# Altium PCB CarGeoLogger.PcbDoc
Units mil, origin at the board's own origin, x right, y up, seen from the top; angles counter-clockwise.
Board outline 1968.5 x 1968.5 mil, 2 copper layers (Top Layer, Bottom Layer); 34 components, 34 nets, 195 pads, 29 vias.
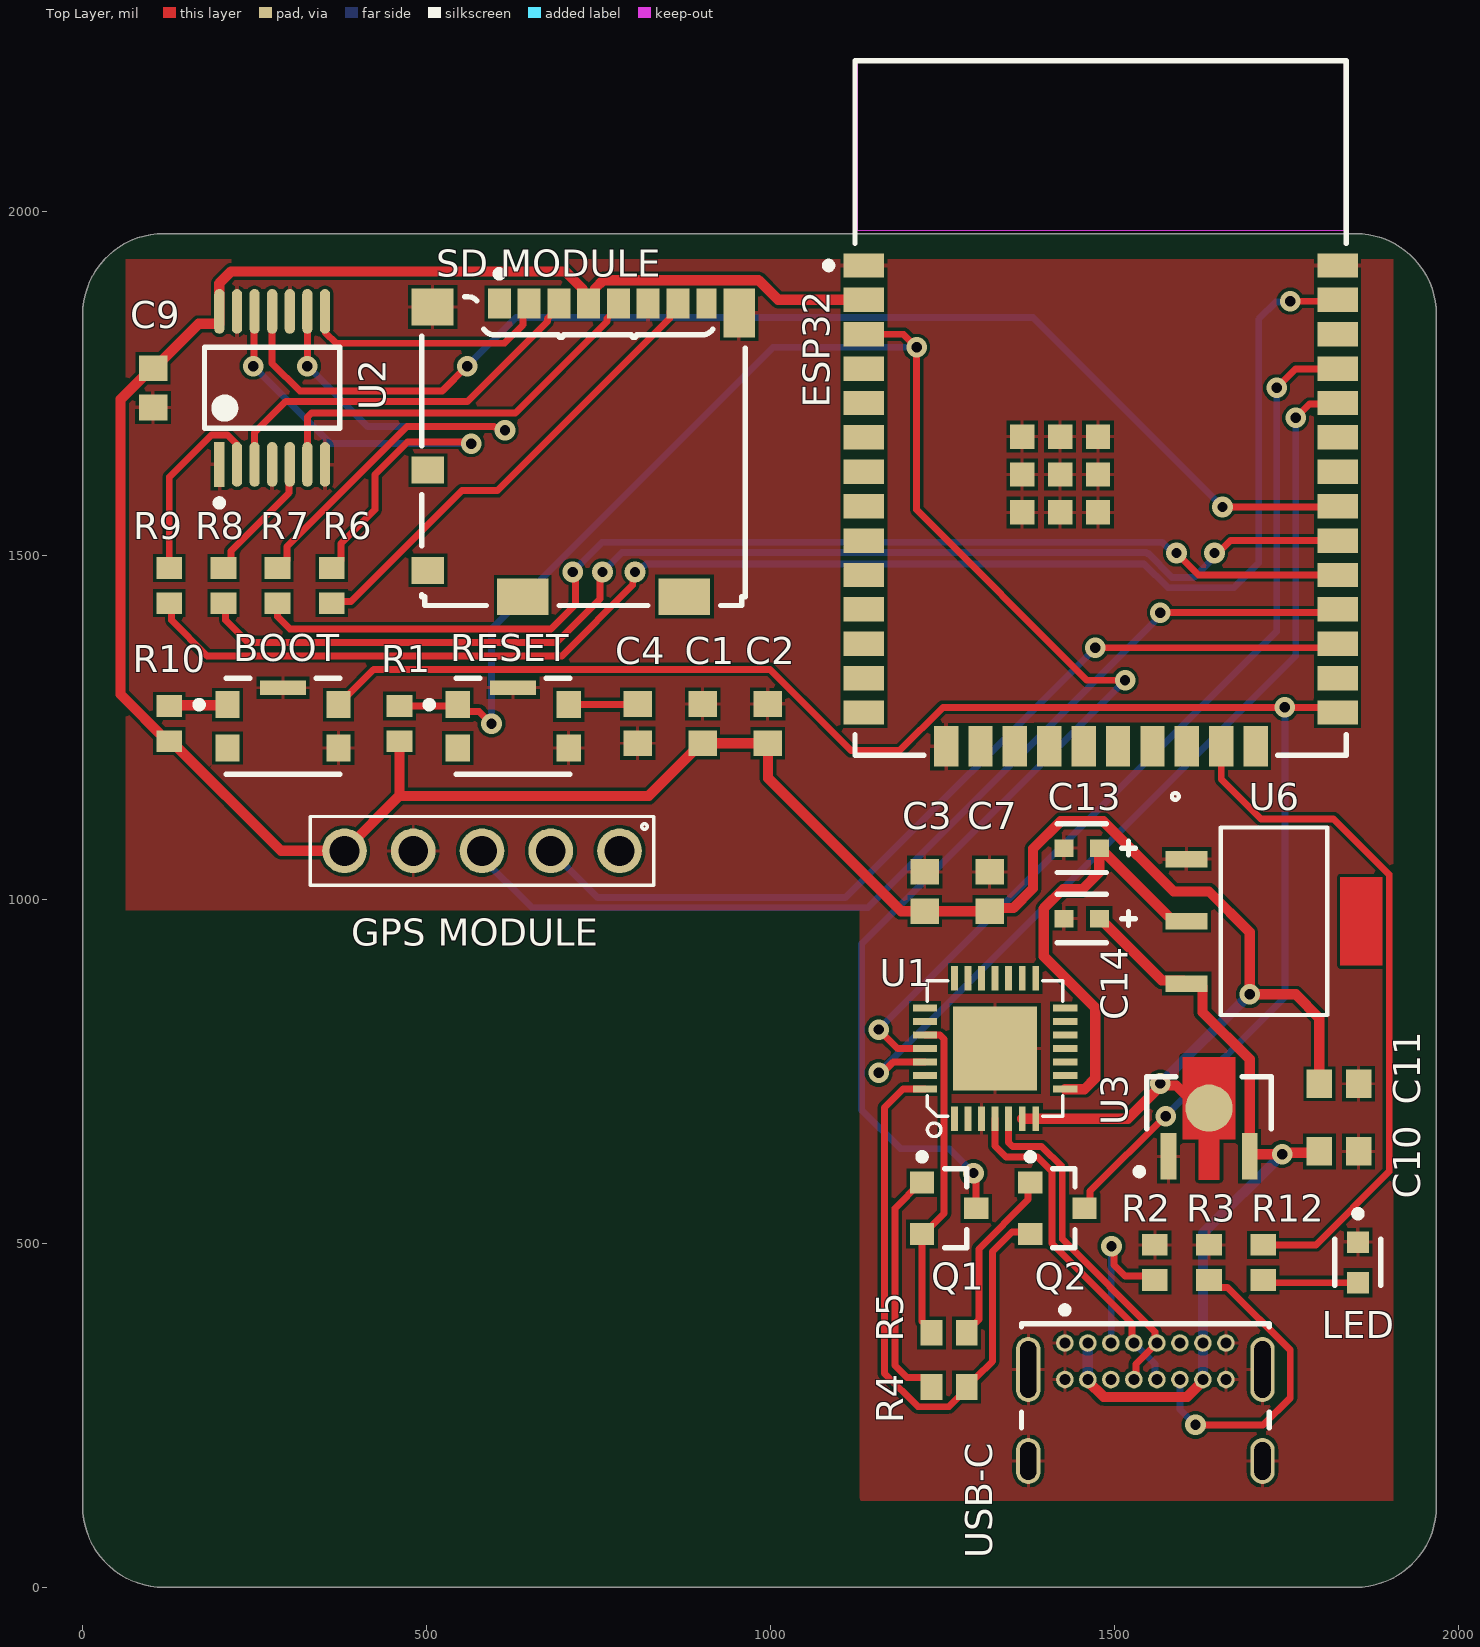
[diagram p0: Top Layer view]
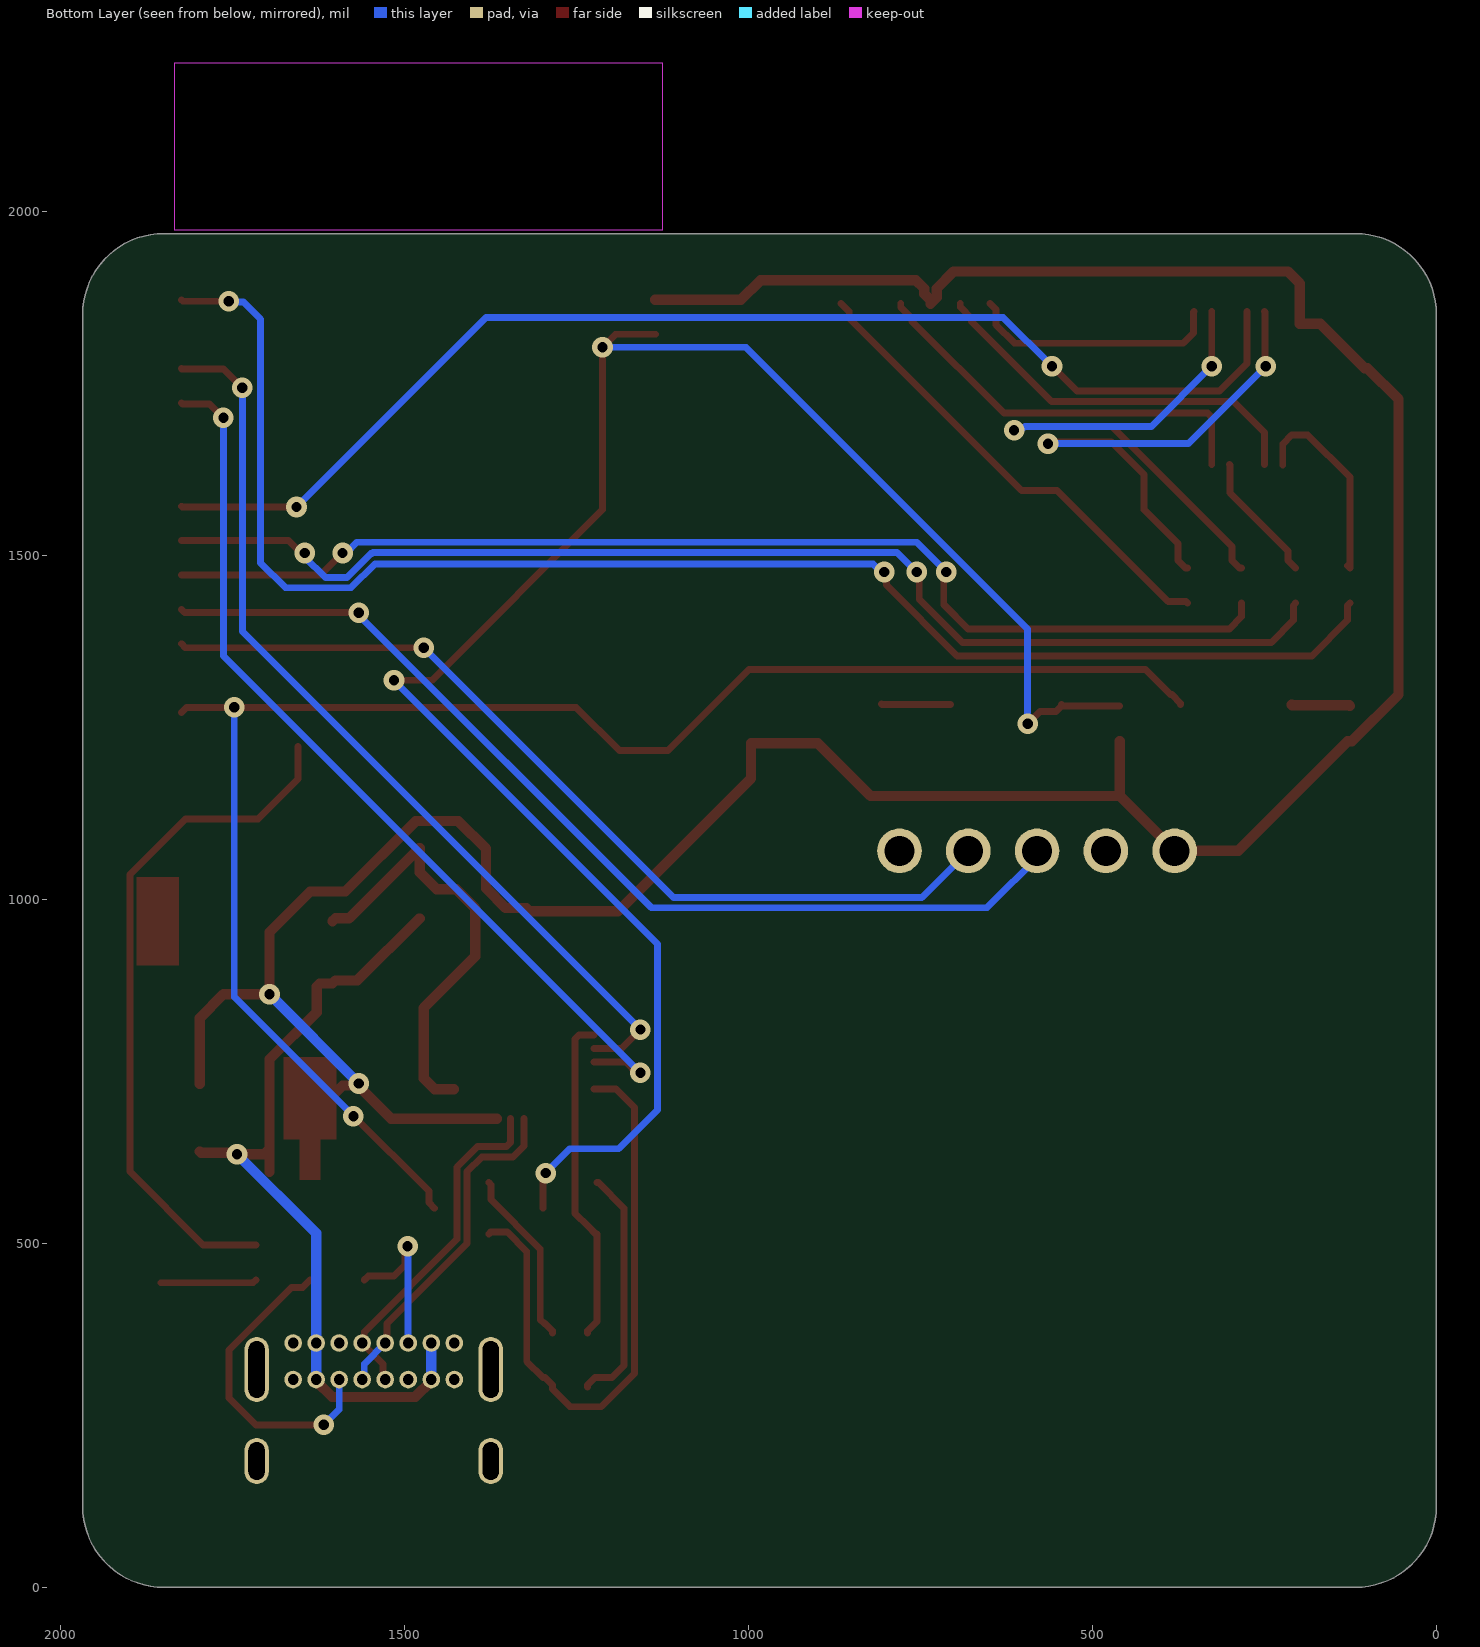
[diagram p1: Bottom Layer view, seen from below]
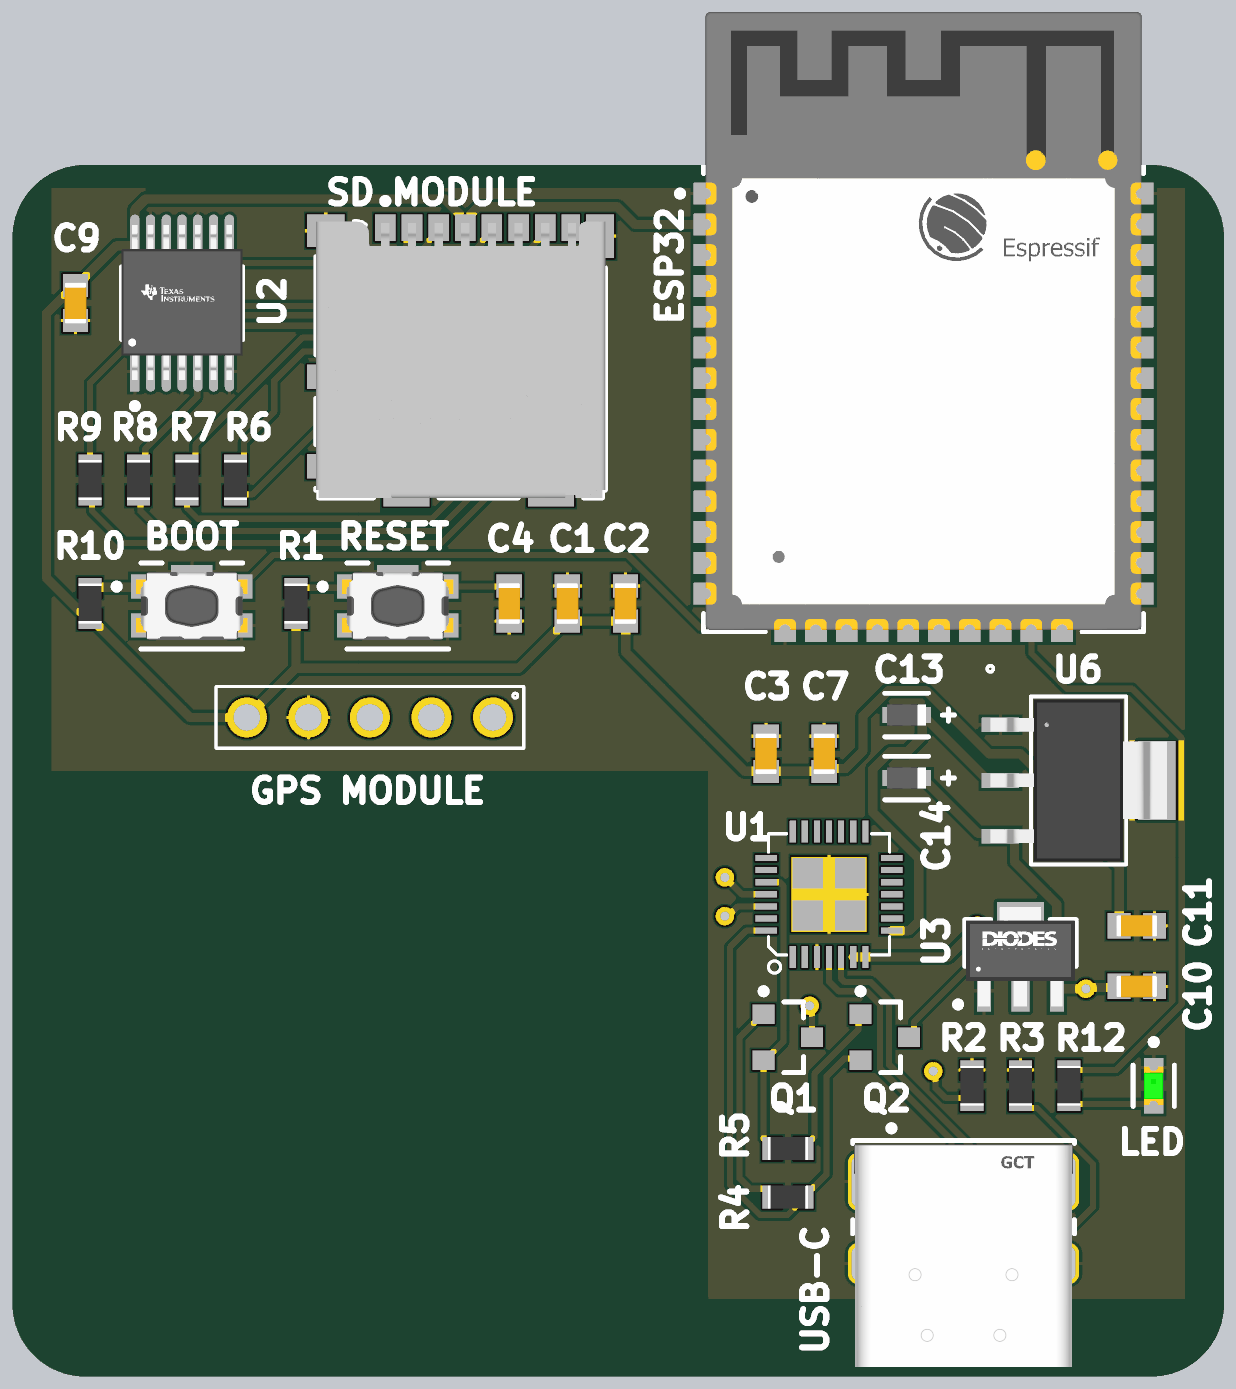
[diagram p2: 3D render of the assembled board from above, using the file's embedded part models]

## Layer stack, top to bottom
Top Solder: solder mask 0.4, Solder Resist, Dk 3.5
Top Layer: signal copper 1.4
Dielectric 1: dielectric 12.6, FR-4, Dk 4.8
Bottom Layer: signal copper 1.4
Bottom Solder: solder mask 0.4, Solder Resist, Dk 3.5

## Board outline
0,118.11 0,1850.39 cw(c118.11,1850.39) 118.11,1968.5 1850.39,1968.5 cw(c1850.39,1850.39) 1968.5,1850.39 1968.5,118.11 cw(c1850.39,118.11) 1850.39,0 118.11,0 cw(c118.11,118.11)

## Design rules (kind name [scope] priority, off if disabled: settings)
BoardOutlineClearance [All] p1: gap=7.87 ignorepadtopadclearanceinfootprint=FALSE
Clearance [All] p1: gap=5 ignorepadtopadclearanceinfootprint=FALSE except(9.84: Arc-Hole Track-Hole SMDPad-Hole THPad-Hole Via-Hole Fill-Hole Poly-Hole Region-Hole Text-Hole)
ComponentClearance [All] p1: gap=5 collisioncheckmode=3 verticalgap=5 showdistances=TRUE
DiffPairsRouting [All] p1: maxlimit=10 minlimit=5 mostfreqgap=5 toplayer_minwidth=5 toplayer_maxwidth=1000 toplayer_prefwidth=5 bottomlayer_minwidth=5 bottomlayer_maxwidth=1000 bottomlayer_prefwidth=5 maxuncoupledlength=500
Height [All] p1: minheight=0 maxheight=71497.94 prefheight=500
HoleSize [All] p1: absolutevalues=TRUE maxlimit=248.03 minlimit=11.81 maxpercent=80.000 minpercent=20.000
HoleToHoleClearance [All] p1: gap=9.84 allowstackedmicrovias=FALSE
MinimumAnnularRing [All] p1: minimumring=3
MinimumSolderMaskSliver [All] p1: minsoldermaskwidth=0
PlaneClearance [All] p1: clearance=5
PlaneConnect PlaneConnectPowerPads [InPadClass('PowerPads')] p1: planeconnectstyle=Direct reliefexpansion=20 reliefentries=4 reliefconductorwidth=10 reliefairgap=10
PlaneConnect [All] p2: pad.planeconnectstyle=Relief pad.reliefexpansion=11.81 pad.reliefentries=4 pad.reliefconductorwidth=5 pad.reliefairgap=5 via.planeconnectstyle=Direct via.reliefexpansion=11.81 via.reliefentries=4 via.reliefconductorwidth=5 via.reliefairgap=5
PolygonConnect PolygonConnectPowerPads [All vs (InPadClass('PowerPads'))] p1: connectstyle=Direct reliefconductorwidth=10 reliefentries=4 polygonreliefangle="90 Angle" airgapwidth=10
PolygonConnect [All] p2: thpad.connectstyle=Relief thpad.reliefconductorwidth=5 thpad.reliefentries=4 thpad.polygonreliefangle="90 Angle" thpad.airgapwidth=5 smdpad.connectstyle=Relief smdpad.reliefconductorwidth=5 smdpad.reliefentries=4 smdpad.polygonreliefangle="90 Angle" smdpad.airgapwidth=5 via.connectstyle=Direct via.reliefconductorwidth=5 via.reliefentries=4 via.polygonreliefangle="90 Angle" via.airgapwidth=5
RoutingVias [All] p1: holewidth=11.81 width=23.62 viastyle="Through Hole" minholewidth=11.81 minwidth=23.62 maxholewidth=23.62 maxwidth=259.84
SilkToSilkClearance [All] p1: silktosilkclearance=0
SilkToSolderMaskClearance [IsPad] p1: minsilkscreentomaskgap=5 clearancetoexposedcopper=TRUE
SolderMaskExpansion [All] p1: expansion=2.95 istentingtop=FALSE
Width [All] p1: maxlimit=1000 minlimit=5 preferedwidth=5 minimp=50.000000 maximp=50.000000 favimp=50.000000
20 further rules are at their usual default settings.

## Components (designator, comment, footprint, x,y, rotation, side; value= is the part's Value field where it differs from the comment)
BOOT "KMR221GLFS" FP-KMR221GLFS-MFG 291.34,1251.97 r0 top (schematic designator SW2)
C1 "22u" CAPC1608X90X35ML10T15 901.57,1255.91 r270 top
C2 "0.1u" CAPC1608X90X35ML10T15 996.06,1255.91 r270 top
C3 "10u" CAPC1608X90X35ML10T15 1224.41,1011.81 r270 top
C4 "1u" CAPC1608X90X35ML10T15 807.09,1255.91 r90 top
C7 "0.1u" CAPC1608X90X35ML10T15 1318.9,1011.81 r270 top
C9 "0.1u" CAPC1608X90X35ML10T15 102.36,1744.09 r90 top
C10 "10u" CAPC1608X90X35ML10T15 1826.77,633.86 r180 top
C11 "22u" CAPC1608X90X35ML10T15 1826.77,732.28 r180 top
C13 "10u" FP-F38M-MFG 1452.76,1074.8 r0 top value=10uF
C14 "10u" FP-F38M-MFG 1452.76,972.44 r0 top value=10uF
ESP32 "ESP32-WROOM-32D(M113DH2800PH3Q0)" FP-ESP32-WROOM-32D_M113DH-MFG 1480.31,1714.96 r0 top (schematic designator MD1)
"GPS MODULE" "61300511121" 61300511121 580.71,1070.87 r180 top locked (schematic designator J2)
LED "LTST-C190GKT" FP-LTST-C190GKT-MFG 1854.33,472.44 r270 top (schematic designator D2)
Q1 "BC817-40LT1G" ONSC-SOT-23-3-318-08_V 1259.84,551.18 r0 top
Q2 "BC817-40LT1G" ONSC-SOT-23-3-318-08_V 1417.32,551.18 r0 top
R1 "10k" RESC1609X50X30NL8T20 460.63,1255.91 r270 top
R2 "5.1k" RESC1609X50X30NL8T20 1559.06,472.44 r270 top
R3 "5.1k" RESC1609X50X30NL8T20 1637.8,472.44 r270 top
R4 "10k" RESC1609X50X30NL8T20 1259.84,291.34 r0 top
R5 "10k" RESC1609X50X30NL8T20 1259.84,370.08 r180 top
R6 "3.3K" RESC1609X50X30NL8T20 362.2,1456.69 r90 top
R7 "3.3K" RESC1609X50X30NL8T20 283.46,1456.69 r90 top
R8 "3.3K" RESC1609X50X30NL8T20 204.72,1456.69 r90 top
R9 "3.3K" RESC1609X50X30NL8T20 125.98,1456.69 r270 top
R10 "10k" RESC1609X50X30NL8T20 125.98,1255.91 r270 top
R12 "1k" RESC1609X50X30NL8T20 1716.54,472.44 r90 top
RESET "KMR221GLFS" FP-KMR221GLFS-MFG 625.98,1251.97 r0 top (schematic designator SW1)
"SD MODULE" "104031-0811" MOLX-104031-0811_V 728.35,1653.54 r180 top (schematic designator SD1)
U1 "CP2102-GMR(QFN28)" QFN28G_0.5-5X5MM 1326.77,783.46 r90 top
U2 "SN74LVC125APWR" FP-PW0014A-IPC_B 275.59,1744.09 r90 top
U3 "AZ1117CR-3.3TRG1" FP-SOT89-MFG 1637.8,691.1 r0 top
U6 "NCV1117ST50T3G" SOT223-3_ONS 1732.28,968.5 r270 top
USB-C "USB4085-GF-A" FP-USB4085-GF-A-MFG 1545.28,196.85 r0 top locked (schematic designator J1)

## Footprints (in the part's own frame and the unit in brackets; to place one, negate y for a bottom-side part, rotate by r counter-clockwise, add the part's x,y. Pads: shape width x height; smd on the part's side, far side on the other; paste and mask are expansions set on the pad)
61300511121 [mm]
  round 1.65 hole 1.1: 1(-5.08,0) 2(-2.54,0) 3(0,0) 4(2.54,0) 5(5.08,0)
  silkscreen extent -6.35,-1.27 6.35,1.27
CAPC1608X90X35ML10T15 [mm] "Chip Capacitor, 2-Leads, Body 1.7x0.9mm, IPC Low Density"
  rect 0.95x1.05 smd: 1(-0.725,0) 2(0.725,0)
  body extent -0.85,-0.45 0.85,0.45, height 0.9
FP-ESP32-WROOM-32D_M113DH-MFG [mm]
  rect 1.5x0.9 smd paste+0 mask+0: 1(-8.75,5.26) 2(-8.75,3.99) 3(-8.75,2.72) 4(-8.75,1.45) 5(-8.75,0.18) 6(-8.75,-1.09) 7(-8.75,-2.36) 8(-8.75,-3.63) 9(-8.75,-4.9) 10(-8.75,-6.17) 11(-8.75,-7.44) 12(-8.75,-8.71) 13(-8.75,-9.98) 14(-8.75,-11.25) 25(8.75,-11.25) 26(8.75,-9.98) 27(8.75,-8.71) 28(8.75,-7.44) 29(8.75,-6.17) 30(8.75,-4.9) 31(8.75,-3.63) 32(8.75,-2.36) 33(8.75,-1.09) 34(8.75,0.18) 35(8.75,1.45) 36(8.75,2.72) 37(8.75,3.99) 38(8.75,5.26)
  rect 0.9x1.5 smd paste+0 mask+0: 15(-5.71,-12.5) 16(-4.44,-12.5) 17(-3.17,-12.5) 18(-1.9,-12.5) 19(-0.63,-12.5) 20(0.64,-12.5) 21(1.91,-12.5) 22(3.18,-12.5) 23(4.45,-12.5) 24(5.72,-12.5)
  rect 0.9x0.9 smd paste+0 mask+0: 39(-2.9,-3.86) 39(-2.9,-2.46) 39(-2.9,-1.06) 39(-1.5,-3.86) 39(-1.5,-2.46) 39(-1.5,-1.06) 39(-0.1,-3.86) 39(-0.1,-2.46) 39(-0.1,-1.06)
  Keep-Out Layer region: -9,6.56 9,6.56 9,12.75 -9,12.75
  Keep-Out Layer region: -9,6.56 9,6.56 9,12.75 -9,12.75
  silkscreen extent -10.17,-12.83 9.08,12.83, body extent -9.6,-13.35 9.6,12.93, height 0.25
FP-F38M-MFG [mm]
  rect 0.7x0.65 smd paste+0 mask+0: 1(-0.65,0) 2(0.65,0)
  silkscreen extent -0.9,-0.9 1.97,0.9, body extent -1.1,-0.63 1.1,0.63, height 0.25
FP-KMR221GLFS-MFG [mm]
  rect 0.9x1 smd paste+0 mask+0: 1(-2.05,0.8) 2(2.05,0.8) 3(-2.05,-0.8) 4(2.05,-0.8)
  rect 1.7x0.55 smd paste+0 mask+0: 5(0,1.425)
  silkscreen extent -3.22,-1.78 2.1,1.78, body extent -2.6,-1.5 2.6,1.8, height 0.25
FP-LTST-C190GKT-MFG [mm]
  rect 0.8x0.8 smd paste+0 mask+0: 1(-0.75,0) 2(0.75,0)
  silkscreen extent -1.92,-0.85 0.85,0.85, body extent -1.25,-0.55 1.25,0.55, height 0.25
FP-PW0014A-IPC_B [mm]
  rect 1.655x0.381 smd paste+0 mask+0: 1(-2.825,1.95)
  rrect100% 1.655x0.381 smd paste+0 mask+0: 2(-2.825,1.3) 3(-2.825,0.65) 4(-2.825,0) 5(-2.825,-0.65) 6(-2.825,-1.3) 7(-2.825,-1.95) 8(2.825,-1.95) 9(2.825,-1.3) 10(2.825,-0.65) 11(2.825,0) 12(2.825,0.65) 13(2.825,1.3) 14(2.825,1.95)
  silkscreen extent -4.37,-2.5 1.5,2.5, body extent -3.9,-2.75 3.9,2.75, height 0.25
FP-SOT89-MFG [mm]
  rect 0.58x1.73 smd paste+0 mask+0: 1(-1.5,-1.635) 3(1.5,-1.635)
  round 1.74 smd paste+0 mask+0: 2(0,0.146)
  Top Layer region: -0.38,-2.5 -0.38,-1 -0.967,-1 -0.967,2.03 0.967,2.03 0.967,-1 0.38,-1 0.38,-2.5
  silkscreen extent -2.7,-2.32 2.3,1.3, body extent -2.4,-2.6 2.4,2.13, height 0.25
FP-USB4085-GF-A-MFG [mm]
  rrect100% 0.9x2.4 hole 2.1 slot 0.6 at 0 deg paste-1000 mask+0: 1(-4.325,3.045) 2(4.325,3.045)
  rrect100% 0.9x1.7 hole 1.4 slot 0.6 at 0 deg paste-1000 mask+0: 3(-4.325,-0.335) 4(4.325,-0.335)
  round 0.65 hole 0.4 paste-1000 mask+0: A1(-2.975,4.025) A4(-2.125,4.025) A5(-1.275,4.025) A6(-0.425,4.025) A7(0.425,4.025) A8(1.275,4.025) A9(2.125,4.025) A12(2.975,4.025) B1(2.975,2.675) B4(2.125,2.675) B5(1.275,2.675) B6(0.425,2.675) B7(-0.425,2.675) B8(-1.275,2.675) B9(-2.125,2.675) B12(-2.975,2.675)
  silkscreen extent -4.57,0.89 4.57,5.37, body extent -4.87,-4.83 4.87,4.83, height 0.25
MOLX-104031-0811_V [mm] "Micro SD, 8-Leads, Body 11.95x11.4mm, Pitch 1.1mm"
  rect 0.85x1.1 smd: 1(3.113,-5.412) 2(2.013,-5.412) 3(0.913,-5.412) 4(-0.188,-5.412) 5(-1.288,-5.412) 6(-2.387,-5.412) 7(-3.487,-5.412)
  rect 0.75x1.1 smd: 8(-4.537,-5.412)
  rect 1.2x1 smd: 9(5.748,0.738) 10(5.748,4.438)
  rect 1.55x1.35 smd: 11(5.573,-5.287)
  rect 1.17x1.8 smd: 12(-5.747,-5.062)
  rect 1.9x1.35 smd: 13(-3.722,5.413) 14(2.248,5.413)
  silkscreen extent -5.97,-6.64 5.98,5.74, body extent -5.97,-5.66 5.98,5.74, height 1.45
ONSC-SOT-23-3-318-08_V [mm] "SOT23, 3-Leads, Body 2.92x1.3mm, Pitch 0.95mm"
  rect 0.9x0.8 smd: 1(-1,0.95) 2(-1,-0.95) 3(1,0)
  silkscreen extent -1.12,-1.46 0.65,2.02, body extent -0.65,-1.46 0.65,1.46, height 1.11
QFN28G_0.5-5X5MM [mm]
  rect 0.9x0.254 smd: 1(-2.59,1.5) 2(-2.59,1) 3(-2.59,0.5) 4(-2.59,0) 5(-2.59,-0.5) 6(-2.59,-1) 7(-2.59,-1.5) 15(2.59,-1.5) 16(2.59,-1) 17(2.59,-0.5) 18(2.59,0) 19(2.59,0.5) 20(2.59,1) 21(2.59,1.5)
  rect 0.254x0.9 smd: 8(-1.5,-2.59) 9(-1,-2.59) 10(-0.5,-2.59) 11(0,-2.59) 12(0.5,-2.59) 13(1,-2.59) 14(1.5,-2.59) 22(1.5,2.59) 23(1,2.59) 24(0.5,2.59) 25(0,2.59) 26(-0.5,2.59) 27(-1,2.59) 28(-1.5,2.59)
  rect 3.1x3.1 smd paste-3: 29(0,0)
  silkscreen extent -3.25,-2.5 2.5,2.5
RESC1609X50X30NL8T20 [mm] "Chip Resistor, 2-Leads, Body 1.65x0.95mm, IPC Medium Density"
  rect 0.8x0.95 smd: 1(-0.65,0) 2(0.65,0)
  body extent -0.82,-0.48 0.82,0.48, height 0.5
SOT223-3_ONS [mil]
  rect 24x61 smd paste+0 mask+0: 1(-90.5,-127) 2(0,-127) 3(90.5,-127)
  Top Layer region: 64,96.5 64,157.5 -64,157.5 -64,96.5
  silkscreen extent -186,-148 137,78, body extent -131,-144 131,144, height 68

## Part data
BOOT RESET: library part CMP-10040-000018-1, "SWITCH TACTILE SPST-NO 0.05A 32V", Case/Package=SMD/SMT, Contact Current Rating=50mA, Contact Resistance=100mR, Max Operating Temperature=85°C, Max Voltage Rating (DC)=32V, Min Operating Temperature=-40°C, Operating Force=2N, Package Quantity=1, Power Rating=1W, Actuator Length=0.5mm, Actuator Type=Standard, Contact Material=Silver, Contact Plating=Silver, Current Rating=50mA, Depth=4.6mm, Illumination Type=Non-Illuminated, Lead Free="Lead Free", Length=2.8mm, Max Current Rating=50mA, Mechanical Life=200000Cycles, Mount="Surface Mount", Orientation=Straight, Packaging="Tape and Reel", Radiation Hardening=No, REACH SVHC="No SVHC", Switch Function=Off-Mom, Switch Travel=0.25mm, Termination="Gull Wing", Throw Configuration=SPST, Voltage Rating (DC)=32V, Width=2.8mm
C1 C11: library part CMP-2000-04945-1, "Chip Capacitor, 0603 (1608 Metric), F381A106MMAAH1", Capacitance=22pF, Case Size/Dimension=0603, Dielectric=C0G, Manufacturer=Murata, Package Description="2-Pin Surface Mount Device, Body 1.6 x 0.8 mm", Package Reference=603, Rated Voltage=50V, Tolerance (%)=±5%, ComponentLink1Description=https://www.digikey.com/en/products/detail/kyocera-avx/F381A106MMAAH1/5730801, Datasheet URL=https://datasheet.ciiva.com/11786/0900766b807a1cab-11786398.pdf, Datasheet Version=Jul-06, Manufacturer URL=http://www.murata.com/
C2 C3 C4 C7 C9 C10: library part CMP-2000-04945-1, "Chip Capacitor, 0603 (1608 Metric)", Capacitance=22pF, Case Size/Dimension=0603, Dielectric=C0G, Manufacturer=Murata, Package Description="2-Pin Surface Mount Device, Body 1.6 x 0.8 mm", Package Reference=603, Rated Voltage=50V, Tolerance (%)=±5%, Datasheet URL=https://datasheet.ciiva.com/11786/0900766b807a1cab-11786398.pdf, Datasheet Version=Jul-06, Manufacturer URL=http://www.murata.com/
C13 C14: library part CMP-04423-000015-1, "CAP TANT POLY 10UF 10V SMD", Capacitance=10uF, Leakage Current=10uA, Manufacturer=AVX, Manufacturer Part Number=F381A106MMAAH1, Package=F38M, Ripple Current=289mA, Temperature="-55°C to +105°C", Temperature Range High=+105°C, Temperature Range Low=-55°C, Tolerance=20%, Voltage Rating=10V, Automotive=No, Category=Cap, ComponentLink2Description=Datasheet, ComponentLink2URL=http://datasheets.avx.com/F38.pdf, Device Class L1="Passive Components", Device Class L2=Capacitors, Device Class L3="Polymer Capacitors", Digikey Description="CAP TANT POLY 10UF 10V SMD", Dissipation Factor=15%, Esr=300mΩ, Footprint Url=http://www.avx.com/download/software/literature/AVX-Footprint-Library.pdf, Height=0.9mm, Lead Free=Yes, Life=1000Hours, Material=Tantalum-Polymer, Mouser Description="Cap Tant Polymer 10uF 10VDC M CASE 20% (1.6 X 0.85 X 0.8mm) Undertab SMD 1608-09 0.3 Ohm 105C T/R", Octopart=https://octopart.com/f381a106mmaah1-avx-67040376, RoHS=TRUE
ESP32: library part CMP-194065-000024-1, "RX TXRX MOD WIFI TRACE ANT SMD"
"GPS MODULE": library part CMP-059-000000-1, "Connector Header Through Hole 5 position 0.100 (2.54mm)", Package=None, Availability="In Stock", Check_prices=https://www.snapeda.com/parts/61300511121/Wurth+Electronics+Inc./view-part/?ref=eda, Component Type=Standard, Design Item ID=61300511121, MF="Wurth Electronics", MP=61300511121, Pin Count=5, Price=None, Purchase-URL=https://pricing.snapeda.com/search/part/61300511121/?ref=eda, SnapEDA_Link=https://www.snapeda.com/parts/61300511121/Wurth+Electronics+Inc./view-part/?ref=snap, Source=61300511121.SchLib
LED: library part CMP-22017-000005-2, "LED GREEN CLEAR CHIP SMD", Case Code (Imperial)=0603, Case Code (Metric)=1608, Color=Green, Forward Current=30mA, Forward Voltage=2.1V, Lens Color=Colorless, Max Operating Temperature=85°C, Min Operating Temperature=-55°C, Package Quantity=1, Power Dissipation=100mW, Reverse Voltage=5V, Test Current=10mA, Voltage=2V, Case/Package=0603, Depth=0.8mm, Dominant Wavelength=569nm, Height=0.8mm, Illumination Color=Green, Lead Free="Lead Free", Length=1.6mm, Lens Style=Clear, Lens Transparency=Clear, Luminous Intensity=6mcd, Mount="Surface Mount", Number of Elements=1, Number of LEDs=1, Number of Pins=2, Packaging="Tape and Reel", Power Rating=100mW, Radiation Hardening=No, Viewing Angle=130°, Wavelength=565nm, Width=0.8mm
Q1 Q2: library part CMP-1048-00019-1, "General Purpose Transistor, NPN Silicon, 3-Pin SOT-23, Pb-Free, Tape and Reel", Manufacturer="On Semiconductor", ComponentLink1Description="Manufacturer URL", ComponentLink1URL=http://www.onsemi.com/, ComponentLink2Description=Datasheet, ComponentLink2URL=http://www.onsemi.com/pub_link/Collateral/BC817-16LT1-D.PDF, ComponentLink3Description="Package Specification", ComponentLink3URL=http://www.onsemi.cn/pub_link/Collateral/318-08.PDF, DatasheetVersion="Rev. 12", fT Min (MHz)=100, IC Continuous (A)=0.5, Mounting Technology="Surface Mount", PackageDescription="3-Pin Small Outline Transistor, Body 2.92 x 1.3 mm, Pitch 0.95 mm", PackageReference=SOT-23-3-318-08, PackageVersion="Rev. AP, 11/2009", Packing="Tape and Reel", PartNumber=BC817-40LT1G, Polarity=NPN, RoHS=TRUE
R1 R2 R3 R4 R5 R6 R7 R8 R9 R10 R12: library part CMP-2000-03816-5, "Chip Resistor, 0603 (1608 Metric)", Manufacturer="Vishay Semiconductor", Max Operating Temperature="155 degC", Min Operating Temperature="-55 degC", Package Quantity=5000, Voltage Rating="75 V", ComponentLink1Description="Manufacturer URL", ComponentLink1URL=http://www.vishay.com/, ComponentLink2Description=Datasheet, ComponentLink2URL=http://www.vishay.com/docs/20035/dcrcwe3.pdf, DatasheetVersion=06/2012, Height="0.45 mm", Length="1.55 mm", Mount="Surface Mount", Mounting Technology="Surface Mount", PackageDescription="2-Pin Surface Mount Device, Body 1.575 x 0.85 mm", PackageReference=0603, Packaging="Tape and Reel", Pins=2, REACH SVHC=Unknown, RoHSCompliant=true
"SD MODULE": library part CMP-2000-05825-1, "Micro SD Card, RA, -25 to 85 degC, 8-Pin SMD, RoHS, Tape and Reel", Current Rating=500mA, Manufacturer=Molex, Package Description="8-Pin Surface Mount Device, Body 11.95 x 11.4 mm, Pitch 1.1 mm", Voltage Rating=10VAC/DC, Brand=Molex, Card Type=microSD, ComponentLink1Description=https://www.digikey.com/en/products/detail/molex/1040310811/2804769?utm_adgroup=Memory%20Connectors%20-%20PC%20Card%20Sockets&utm_source=google&utm_medium=cpc&utm_campaign=Shopping_Product_Connectors%2C%20Interconnects_NEW&utm_term=&utm_content=Memory%20Connectors%20-%20PC%20Card%20Sockets&gclid=Cj0KCQiAkMGcBhCSARIsAIW6d0B1XDvVP_Lj4c3XwzfmNxsc3S9UzxOJEQPBbiR74h_ZBigbZJJcNlIaAqCzEALw_wcB, Contact Material=PhosphorBronze, Contact Plating=Gold, Datasheet URL=http://www.molex.com/pdm_docs/sd/1040310811_sd.pdf, Datasheet Version="Rev. E, 04/2006", Height=1.42mm, Housing Material=LiquidCrystalPolymer(LCP), Insertion - Extraction Style=Push-Pull, Length=11.4mm, Manufacturer URL=http://www.molex.com/, Mating Cycles=10000, Mounting Technology=SurfaceMount, Mounting Type=Standard, Number of Contacts=8, Number of Rows=1Row, Orientation=RightAngle, Package Reference=104031-0811, Packaging=Reel, Pitch=1.1mm, Product=CardConnectors, Product Category=MemoryCardConnectors, RoHS=True, Series=104031, Termination Style=SMD
U1: library part CMP-037-000000-1, "USB Bridge, USB to UART USB 2.0 UART Interface 28-QFN _5x5_", Package="VFQFN-28 Vishay Siliconix", Availability=Unavailable, Component Type=Standard, ComponentLink1Description=https://www.digikey.com/en/products/detail/silicon-labs/CP2102-GMR/2051863, Design Item ID=INTERFACE-CP2102-GMR(QFN28), MF=Silicon, MP=CP2102-GMR, Pin Count=29, Price=None, SnapEDA_Link=https://www.snapeda.com/parts/CP2102-GMR/Silicon%20Labs/view-part/570818/?ref=snap, Source=SnapEDAsch.SchLib
U2: library part CMP-0440-00179-4, "IC BUF NON-INVERT 3.6V 14TSSOP", Case/Package=TSSOP, High Level Output Current=-24mA, Low Level Output Current=24mA, Max Operating Temperature=125°C, Max Power Dissipation=500mW, Max Supply Voltage=3.6V, Min Operating Temperature=-40°C, Min Supply Voltage=1.65V, Package Quantity=1, Quiescent Current=1uA, Contact Plating=Gold, Height=1.15mm, Lead Free="Lead Free", Length=5mm, Logic Function=Buffer, Mount="Surface Mount", Number of Bits=4, Number of Bits per Element=1, Number of Channels=4, Number of Circuits=4, Number of Elements=4, Number of Gates=4, Number of Input Lines=4, Number of Inputs=4, Number of Output Lines=3, Number of Outputs=4, Number of Pins=14, Packaging="Tape and Reel", Polarity=Non-Inverting, Propagation Delay=4.6ns, Radiation Hardening=No, REACH SVHC="No SVHC", Termination=SMD/SMT, Turn-On Delay Time=5.3ns, Width=4.4mm
U3: library part CMP-12756-000007-1, "IC REG LINEAR 3.3V 800MA SOT89", Dropout Voltage=1.2V, Manufacturer="Diodes Inc.", Max Junction Temp=+125°C, Max Supply Voltage=15V, Nominal Supply Current=4mA, Output Current=1.35A, Output Voltage=3.3V, Package=SOT89, Temperature="-20°C to +125°C", Temperature Range Low=-20°C, Accuracy Percentage=1%, Automotive=No, Category=IC, ComponentLink2Description=Datasheet, ComponentLink2URL=https://www.diodes.com/assets/Datasheets/AZ1117C.pdf, Device Class L1="Integrated Circuits (ICs)", Device Class L2="Power Management ICs", Device Class L3="Voltage Regulators - Linear", Digikey Description="IC REG LINEAR 3.3V 800MA SOT89", Footprint Url=https://www.diodes.com/assets/Package-Files/SOT89.pdf, Height=1.6mm, Lead Free=Yes, Manufacturer Part Number=AZ1117CR-3.3TRG1, Mouser Description="DiodesZetex AZ1117CR-3.3TRG1, LDO Regulator, 800mA, 3.3 V, ±1% 3-Pin, SOT-89", Number of Outputs=1, Octopart=https://octopart.com/az1117cr-3.3trg1-diodes+inc.-30954805, Output Type=Fixed, RoHS=TRUE, Temperature Range High=+125°C
U6: library part CMP-053-000001-1, "No Description Available", Mfr_Name=onsemi, ComponentLink1Description=https://www.digikey.com/en/products/detail/onsemi/NCV1117ST50T3G/1792666, Copyright="Copyright (C) 2022 Ultra Librarian. All rights reserved.", Design Item ID=NCV1117ST50T3G, Digi-Key_Part_Number_1=NCV1117ST50T3GOSCT-ND, Digi-Key_Part_Number_2=NCV1117ST50T3GOSDKR-ND, Digi-Key_Part_Number_3=NCV1117ST50T3GOSTR-ND, Digi-Key_Part_Number_4=2156-NCV1117ST50T3G-OS-ND, Manufacturer_Part_Number=NCV1117ST50T3G, RefDes=RefDes, Source=NCV1117ST50T3G.SchLib, Type=DEV
USB-C: library part CMP-196119-000001-2, "CONN RCPT USB2.0 TYPE C 24POS RA", ComponentLink1Description=https://www.digikey.com/en/products/detail/gct/USB4085-GF-A/9859662, Contact Material="Copper Alloy", Contact Plating=Gold, Gender=Receptacle, Number of Positions=16, Orientation="Right Angle", USB Standard="USB 2.0"

## Via types
v1: diameter 30, hole 15, Top Layer to Bottom Layer, 29 vias

## Nets (pads, with @x,y where several pads share a name; then routed paths per layer and width w, separated by ;. In a path a pad name is that pad's centre, name@x,y a point inside that pad or via, vN(x,y) a via of type N, cw(c..) or ccw(c..) an arc to the next point about the centre after c; other vN are vias at no path point)
+3V3: "GPS MODULE.5" "SD MODULE.4" C1.2 C2.2 C3.2 C7.2 C9.2 C11.2 ESP32.2 R1.2 R10.2 U1.6 U1.7 U2.14 U3.2 | length 4640.7
  Top Layer w15: U2.14@198.81,1837.12 168.81,1837.12 104.33,1772.64 C9.2 100.39,1772.64 55.12,1727.36 55.12,1298.23 123.03,1230.31 R10.2 128.94,1230.31 288.39,1070.87 380.71,1070.87 460.63,1150.79 ; U2.14@198.82,1837.13 198.82,1893.28 198.82,1895.97 216.23,1913.39 701.73,1913.39 726.5,1888.62 726.5,1875.87 735.73,1866.63 735.73,1871.56 744.96,1880.79 744.96,1888.62 757.13,1900.79 982.84,1900.79 1011.58,1872.05 ESP32.2 ; R1.2 460.63,1150.79 ; C3.2@1222.44,983.27 C7.2 1323.38,987.75 1353.28,987.75 1381.89,1016.36 1381.89,1073.78 1422.28,1114.17 1484.25,1114.17 1586.61,1011.81 1637.8,1011.81 1696.85,952.76 v1(1696.85,862.2) 1763.78,862.2 1798.23,827.76 C11.2 ; C3.2 1189.96,983.27 996.6,1176.63 996.6,1227.36 C1.2 899.61,1227.36 823.03,1150.79 460.63,1150.79 ; U1.6 U1.7 1519.93,681.5 1566.97,728.54 v1(1566.97,732.6) ; v1@1569.84,729.73 1590.44,729.73 1623.32,696.85 U3.2
  Bottom Layer w15: v1(1566.97,732.6) 1567.11,732.6 1696.71,862.2 v1(1696.85,862.2)
+5V: C13.2 U1.8 U6.2 | length 636.9
  Top Layer w15: U1.8 1456.69,724.41 1472.44,740.16 1472.44,842.52 1397.64,917.32 1397.64,987.17 1425.43,1014.96 1453.8,1014.96 1478.35,1039.51 C13.2 1479.33,1074.8 1581.13,973 1600.78,973 U6.2
CS: ESP32.29 R7.1 | length 1673.5
  Top Layer w10: R7.1 283.46,1411.37 301.13,1393.7 681.1,1393.7 716.43,1429.02 716.43,1472.55 v1(712.6,1476.38) ; v1(1590.55,1503.94) 1622.44,1472.05 ESP32.29
  Bottom Layer w10: v1(712.6,1476.38) 755.91,1519.68 1569.39,1519.68 1585.14,1503.94 v1(1590.55,1503.94)
CS_LLS: "SD MODULE.2" U2.8 | length 370.6
  Top Layer w10: U2.8 353.32,1854.38 353.32,1823.85 368.11,1809.05 613.63,1809.05 640.41,1835.84 640.41,1857.93 649.11,1866.63
D0_LLC: "SD MODULE.7" R6.1 | length 689.2
  Top Layer w10: R6.1 364.46,1433.35 390.05,1433.35 551.52,1594.82 603.06,1594.82 853.92,1845.68 853.92,1854.9 865.65,1866.63
D+: U1.4 USB-C.A6 USB-C.B6 | length 503.5
  Top Layer w10: U1.4 1326.77,641.73 1342.52,625.98 1388.16,625.98 1409.45,604.69 1409.45,500 1525.78,383.67 1525.78,358.08 USB-C.A6
  Bottom Layer w10: USB-C.A6 1559.02,324.83 1559.02,305.15 USB-C.B6
D-: U1.5 USB-C.A7 USB-C.B7 | length 507.1
  Top Layer w10: U1.5 1346.46,646.84 1352.31,640.98 1394.37,640.98 1424.45,610.91 1424.45,506.21 1559.02,371.64 1559.02,358.3 USB-C.A7 1531.53,324.83 1531.53,305.15 USB-C.B7
DI_LLS: "SD MODULE.3" U2.3 | length 571.8
  Top Layer w10: U2.3 250,1679.13 295.28,1724.41 559.42,1724.41 675.85,1840.84 675.85,1845.14 692.42,1861.71 692.42,1866.63
DTR: Q2.2 R4.2 U1.28 | length 891.4
  Top Layer w10: U1.28 1192.91,724.41 1166.1,697.6 1166.1,310.9 1214.36,262.64 1259.68,262.64 1285.43,288.39 R4.2 1285.43,294.29 1296.18,305.04 1299.13,305.04 1322.83,328.74 1322.83,488.19 1351.09,516.45 1375.28,516.45 Q2.2
EN: ESP32.3 Q1.3 R1.1 RESET.1 | length 2833.7
  Top Layer w10: R1.1 RESET.1@543.31,1281.5 ; RESET.1 545.28,1281.5 553.02,1273.76 576.64,1273.76 v1(594.49,1255.91) ; ESP32.3 1193.7,1822.05 v1(1212.6,1803.15) 1212.6,1566.93 1460.63,1318.9 v1(1515.75,1318.9) ; v1(1295.28,602.36) 1299.21,598.43 Q1.3
  Bottom Layer w10: v1(594.49,1255.91) 594.49,1393.62 1004.01,1803.15 v1(1212.6,1803.15) ; v1(1295.28,602.36) 1259.84,637.8 1188.98,637.8 1132.48,694.29 1132.48,935.63 v1(1515.75,1318.9)
IO0: BOOT.2 ESP32.25 Q2.3 | length 2402.3
  Top Layer w10: BOOT.2 372.05,1285.43 384.76,1298.15 386.73,1298.15 423.23,1334.65 999.38,1334.65 1117.28,1216.74 1188.03,1216.74 1250.82,1279.53 v1(1748.03,1279.53) 1817.32,1279.53 ESP32.25 ; Q2.3 1464.97,559.46 1464.97,576.07 v1@1574.37,685.47
  Bottom Layer w10: v1(1574.8,685.04) 1748.03,858.27 v1(1748.03,1279.53)
LED: ESP32.23 R12.2 | length 1008.8
  Top Layer w10: ESP32.23 1655.51,1175.2 1713.23,1117.48 1818.95,1117.48 1899.78,1036.65 1899.78,604.51 1793.31,498.03 R12.2
MISO: ESP32.31 U2.11 | length 1800.6
  Top Layer w10: U2.11 275.59,1779.53 315.71,1739.41 522.87,1739.41 v1(559.06,1775.59) ; v1(1657.48,1570.87) 1823.62,1570.87 ESP32.31
  Bottom Layer w10: v1(559.06,1775.59) 629.92,1846.46 1381.89,1846.46 v1(1657.48,1570.87)
MOSI: ESP32.37 R9.2 | length 2203.2
  Top Layer w10: R9.2 129.22,1427.87 129.22,1406.21 181.1,1354.33 696.85,1354.33 799.81,1457.29 799.81,1473.04 v1(803.15,1476.38) ; v1(1755.91,1870.08) 1822.83,1870.08 ESP32.37
  Bottom Layer w10: v1(803.15,1476.38) 807.2,1476.38 819.01,1488.19 1543.31,1488.19 1577.99,1453.5 1673.9,1453.5 1710.04,1489.64 1710.04,1843.9 1734.85,1868.71 1754.53,1868.71 v1(1755.91,1870.08)
NetC1_1: "GPS MODULE.4" "SD MODULE.6" "SD MODULE.11" "SD MODULE.12" BOOT.4 BOOT.5 C1.1 C2.1 C3.1 C4.1 C7.1 C9.1 C10.1 C11.1 C13.1 C14.1 ESP32.1 ESP32.15 ESP32.38 ESP32.39 LED.1 R2.1 R3.1 RESET.4 RESET.5 U1.3 U1.29 U2.1 U2.4 U2.7 U2.10 U2.13 U3.1 U6.1 USB-C.1 USB-C.2 USB-C.3 USB-C.4 USB-C.A1 USB-C.A12 USB-C.B1 USB-C.B12
NetC4_2: C4.2 RESET.2 | length 100.8
  Top Layer w10: RESET.2 806.1,1283.46 C4.2
NetD2_2: LED.2 R12.1 | length 139.4
  Top Layer w10: R12.1 1720.47,442.91 LED.2
NetJ1_A5: R2.2 USB-C.A5 | length 238.4
  Top Layer w10: v1(1496.06,496.06) 1499.89,492.24 1499.89,468.61 1515.75,452.76 1553.15,452.76 R2.2
  Bottom Layer w10: USB-C.A5 1495.57,355.81 1495.57,495.57 v1(1496.06,496.06)
NetJ1_B5: R3.2 USB-C.B5 | length 459.2
  Top Layer w10: v1(1618.11,236.22) 1716.54,236.22 1755.91,275.59 1755.91,345.1 1664.91,436.1 1648.54,436.1 R3.2
  Bottom Layer w10: USB-C.B5 1595.47,258.86 v1(1618.11,236.22)
NetQ1_1: Q1.1 R4.1 | length 351.1
  Top Layer w10: Q1.1 1218.5,588.58 1181.1,551.18 1181.1,322.83 1198.9,305.04 1223.5,305.04 1234.25,294.29 R4.1
NetQ2_1: Q2.1 R5.1 | length 257.5
  Top Layer w10: R5.1 1285.43,373.03 1296.18,383.78 1297.29,383.78 1303.15,389.64 1303.15,492.13 1374.72,563.69 1374.72,585.35 Q2.1
NetR6_2: R6.2 U2.12 | length 767.9
  Top Layer w10: v1(248.03,1775.59) 249.05,1776.6 249.05,1854.38 U2.12 ; R6.2 365.16,1482.28 375.91,1493.03 375.91,1517.64 425.2,1566.93 425.2,1618.11 472.44,1665.35 562.49,1665.35 v1(564.86,1662.98)
  Bottom Layer w10: v1(248.03,1775.59) 360.64,1662.98 v1(564.86,1662.98)
NetR7_2: R7.2 U2.9 | length 836
  Top Layer w10: R7.2 286.42,1482.28 297.17,1493.03 297.17,1513.7 471.45,1687.98 598.32,1687.98 600.03,1686.26 610.35,1686.26 v1(614.17,1682.44) ; v1(326.77,1775.59) U2.9
  Bottom Layer w10: v1(326.77,1775.59) 414.38,1687.98 598.32,1687.98 600.03,1686.26 610.35,1686.26 v1(614.17,1682.44)
NetR8_2: R8.2 U2.5 | length 190.6
  Top Layer w10: R8.2 204.92,1482.28 215.67,1493.03 215.67,1507 300.23,1591.56 300.23,1631.9 U2.5
NetR9_1: R9.1 U2.2 | length 295.3
  Top Layer w10: R9.1@129.22,1485.52 R9.1 125.98,1614.25 187.18,1675.45 210.46,1675.45 223.45,1662.45 U2.2@223.45,1631.9
NetR10_1: BOOT.1 R10.1 | length 85.5
  Top Layer w15: R10.1 126.97,1282.48 209.65,1282.48 BOOT.1
RST: Q1.2 R5.2 U1.24 | length 477.5
  Top Layer w10: U1.24 1246.66,803.15 1252.52,797.29 1252.52,543.86 1233.19,524.53 1222.44,513.78 Q1.2 1220.47,386.81 1234.25,373.03 R5.2
RX0: ESP32.34 U1.26 | length 1347.4
  Top Layer w10: v1(1157.48,748.03) 1162.89,748.03 1178.64,763.78 U1.26 ; v1(1763.82,1700.47) 1783.82,1720.47 1823.23,1720.47 ESP32.34
  Bottom Layer w10: v1(1157.48,748.03) 1763.82,1354.37 v1(1763.82,1700.47)
RX2: "GPS MODULE.3" ESP32.28 | length 1463.2
  Top Layer w10: v1(1566.93,1417.32) 1820.08,1417.32 ESP32.28
  Bottom Layer w10: 575.79,1065.94 653.54,988.19 1141.73,988.19 1566.93,1413.39 v1(1566.93,1417.32)
SCK: ESP32.30 R8.1 | length 1771.6
  Top Layer w10: R8.1 207.96,1427.87 207.96,1406.21 240.16,1374.02 688.98,1374.02 752.08,1437.12 752.08,1472.55 v1(755.91,1476.38) ; v1(1645.67,1503.94) 1651.08,1503.94 1669.19,1522.05 ESP32.30
  Bottom Layer w10: v1(755.91,1476.38) 784.21,1504.68 1546.5,1504.68 1547.99,1503.19 1549.52,1503.19 1584.21,1468.5 1615.65,1468.5 1645.67,1498.53 v1(1645.67,1503.94)
SCK_LLS: "SD MODULE.5" U2.6 | length 594.8
  Top Layer w10: U2.6 326.77,1701.58 332.63,1707.44 629.06,1707.44 762.46,1840.84 762.46,1845.14 779.04,1861.71 779.04,1866.63
TX0: ESP32.35 U1.25 | length 1351.7
  Top Layer w10: v1(1157.48,811.02) 1185.04,783.46 U1.25 ; v1(1736.22,1744.09) 1763.78,1771.65 1824.41,1771.65 ESP32.35
  Bottom Layer w10: v1(1157.48,811.02) 1736.22,1389.76 v1(1736.22,1744.09)
TX2: "GPS MODULE.2" ESP32.27 | length 1324.9
  Top Layer w10: v1(1472.44,1366.14) 1818.9,1366.14 ESP32.27
  Bottom Layer w10: 680.71,1070.87 748.39,1003.19 1109.49,1003.19 v1(1472.44,1366.14)
VBUS: C10.2 C14.2 U3.3 U6.3 USB-C.A4 USB-C.A9 USB-C.B4 USB-C.B9 | length 1226
  Top Layer w15: USB-C.B9 1461.61,299.86 1484.6,276.87 1605.95,276.87 1628.94,299.86 USB-C.B4 ; C14.2 1479.33,972.44 1569.27,882.5 1600.78,882.5 U6.3 1623.78,878 1628.28,873.5 1628.28,836.27 1696.85,767.7 U3.3@1696.85,629.94 ; USB-C.A9 USB-C.A9@1628.94,358.18 ; U3.3@1696.85,604.1 U3.3@1696.85,626 ; U3.3@1700.77,633.86 U3.3@1696.85,629.94 ; C10.2 1796.26,631.89 1746.06,631.89 v1(1744.09,629.92) 1700.77,629.92 U3.3@1696.85,626 ; U3.3@1696.85,626 U3.3 U3.3@1696.85,629.94
  Bottom Layer w15: USB-C.B9@1461.61,299.86 USB-C.B9 USB-C.A4 ; USB-C.B4@1628.94,299.86 USB-C.B4 USB-C.A9 1628.94,514.76 v1(1744.09,629.92)
pads on no net: "GPS MODULE.1" "SD MODULE.1" "SD MODULE.8" "SD MODULE.9" "SD MODULE.10" "SD MODULE.13" "SD MODULE.14" BOOT.3 ESP32.4 ESP32.5 ESP32.6 ESP32.7 ESP32.8 ESP32.9 ESP32.10 ESP32.11 ESP32.12 ESP32.13 ESP32.14 ESP32.16 ESP32.17 ESP32.18 ESP32.19 ESP32.20 ESP32.21 ESP32.22 ESP32.24 ESP32.26 ESP32.32 ESP32.33 ESP32.36 RESET.3 U1.1 U1.2 U1.9 U1.10 U1.11 U1.12 U1.13 U1.14 U1.15 U1.16 U1.17 U1.18 U1.19 U1.20 U1.21 U1.22 U1.23 U1.27 USB-C.A8 USB-C.B8

## Polygon pours and split planes (outlines as drawn)
NetC1_1 on Top Layer "NONET_L-01_P-001" (solid, pour order 0): 1905.51,1931.13 1905.51,125.98 1125.98,125.98 1129.92,129.92 1129.92,984.25 62.99,984.25 62.99,1931.13

## Silkscreen, mask and mechanical layers (free items; w line width, h text height)
Mechanical 1:
  the board outline again, w10